# EAGLE board pcb_offset_components (EAGLE 9.5.1)

Size 88.42 x 54.42 mm. Coordinates in mm from the lower left corner, seen from the top.
Outline: 1.18,45.55 0.18,45.55 arc90 0,45.38 0,16.98 arc90 0.18,16.8 1.18,16.8 arc-90 8.8,9.18 8.8,0.18 arc90 8.98,0 79.38,0 arc97 79.55,0.2 arc-97 87.18,8.86 88.18,8.86 arc89 88.29,8.97 88.42,15.34 88.42,37.38 arc90 88.18,37.62 87.18,37.62 arc-90 79.62,45.18 79.62,54.18 arc90 79.38,54.42 8.98,54.42 arc99 8.74,54.14 arc-97 1.18,45.55
Outline: circle at 84.18,11.18 radius 2
Outline: circle at 4.18,43.18 radius 2
Copper layers (1*16): Top 0.035mm / dielectric 1.5mm / Bottom 0.035mm
Design rules "default": minimum track width 6mil, minimum drill 0.35mm, track to track 6mil, track to pad 6mil, pad to pad 6mil, via to via 6mil, smd to smd 6mil, copper to edge 40mil, drill to drill 6mil, minimum pad ring 10mil, minimum via ring 8mil, stop-mask expansion 4mil, vias tented up to drill 0mil, thermal gap 10mil

## Footprints (pad centres in the part's own frame; a part is rotated, then mirrored left to right if it is on the bottom)
C0603 = smd 1.1 x 1: 1 -0.85,0; 2 0.85,0
RBP135 = smd 1.02 x 1.78: 1 -1.93,-4.065; 2 0,-4.065; 3 1.93,-4.065; 5 1.93,4.065; 6 0,4.065; 7 -1.93,4.065 | smd 1.78 x 1.02: 4 4.065,0; 8 -4.065,0
VLPR248582 = drill 1.5 pad 2.25: 1 0,0; 2 0,4.7
DG983-1 = smd 0.66 x 0.31: 1 -1.775,1; 2 -1.775,0.5; 3 -1.775,0; 4 -1.775,-0.5; 5 -1.775,-1; 11 1.775,-1; 12 1.775,-0.5; 13 1.775,0; 14 1.775,0.5; 15 1.775,1 | smd 0.31 x 0.66: 6 -1,-1.775; 7 -0.5,-1.775; 8 0,-1.775; 9 0.5,-1.775; 10 1,-1.775; 16 1,1.775; 17 0.5,1.775; 18 0,1.775; 19 -0.5,1.775; 20 -1,1.775 | smd 1.78 x 1.78: X 0,0
PHA13LN = smd 0.71 x 1.5: 1 -1.5,-1.56; 3 1.5,-1.56 | smd 0.91 x 2.5: 2 0,-1.06 | smd 1.91 x 2.92: 4 0,1.56
SOTFL254P691X411-6N = smd 0.935 x 0.96: 1 -3.262,2.54; 2 -3.262,0; 3 -3.262,-2.54; 4 3.262,-2.54; 5 3.262,0; 6 3.262,2.54
QCV151 = smd 0.6 x 1.5: 1 1,1.5; 2 0,1.5; 3 -1,1.5; 4 -1,-1.5; 5 0,-1.5; 6 1,-1.5
SOT95P280X145-5N = smd 1.25 x 0.6: 1 -1.25,0.95; 2 -1.25,0; 3 -1.25,-0.95; 4 1.25,-0.95; 5 1.25,0.95
SOT95P280X145-6N = smd 1.2 x 0.6: 1 -1.25,0.95; 2 -1.25,0; 3 -1.25,-0.95; 4 1.25,-0.95; 5 1.25,0; 6 1.25,0.95
HDRV6W66P0X254_1X6_1524X254X96 = drill 1.15 pad 1.725 square: 1 0,0 | drill 1.15 pad 1.725: 2 2.54,0; 3 5.08,0; 4 7.62,0; 5 10.16,0; 6 12.7,0
M209730245 = drill 1 pad 1.5: 1 0,0; 2 2.54,0
L3225M = smd 1.6 x 2.2: 1 -1.4,0; 2 1.4,0
LEDC2012X85N = smd 0.9 x 1.4: 1 -0.95,0; 2 0.95,0
APDA3020LZGCK = smd 2 x 1: 1 -1.5,0; 2 1.5,0
R0603 = smd 1 x 1.1: 1 -0.85,0; 2 0.85,0
LPFC011304S = drill 3.61 pad 5.415: 1 0,0; 2 7.15,0
BU-SMA-G = drill 1.27: 1 0,0 | drill 1.778: 2 -2.55,2.55; 3 2.55,2.55; 4 2.55,-2.55; 5 -2.55,-2.55
J502-ND-142-0701-801/806 = smd 5.08 x 2.286: 1 2.565,0; G@1 2.565,4.42; G@2 2.565,-4.42 | smd 5.08 x 2.286 bottom: G@3 2.565,4.42; G@4 2.565,-4.42

## Placement (x,y rotation side)
C7  2.2e-6  [C0603]  49.53,24.13 180 top
C8  2.2e-6  [C0603]  49.53,11.43 180 top
C9  2.2e-6  [C0603]  40.64,11.43 180 top
C10  2.2e-6  [C0603]  40.64,24.13 180 top
C11  10e-6  [C0603]  53.34,33.02 0 top
C12  1e-9  [C0603]  53.34,35.56 0 top
C13  10e-6  [C0603]  53.34,15.24 0 top
C14  1e-9  [C0603]  53.34,17.78 0 top
C15  1e-6  [C0603]  8.89,35.56 180 top
C16  0.01e-6  [C0603]  16.51,30.48 270 top
C17  3.3e-6  [C0603]  19.05,30.48 270 top
C18  100e-12  [C0603]  21.59,30.48 270 top
C19  100e-12  [C0603]  43.18,45.72 270 top
C20  100e-12  [C0603]  35.56,45.72 90 top
C21  100e-12  [C0603]  30.48,45.72 270 top
C22  100e-12  [C0603]  22.86,45.72 90 top
FL1  RBP-135+  [RBP135]  62.23,16.51 270 top
FL2  RBP-135+  [RBP135]  62.1,34.42 270 top
IC1  VLPR-24-858-2  [VLPR248582]  74.93,33.02 0 top
IC2  VLPR-24-858-2  [VLPR248582]  74.93,22.86 0 top
IC3  HSWA2-30DR+  [DG983-1]  11.43,20.32 270 top
IC4  VLPR-24-858-2  [VLPR248582]  74.93,12.7 0 top
IC5  HSWA2-30DR+  [DG983-1]  16.51,10.16 270 top
IC6  HSWA2-30DR+  [DG983-1]  25.4,24.13 270 top
IC7  HSWA2-30DR+  [DG983-1]  25.4,16.51 270 top
IC8  PHA-13LN+  [PHA13LN]  44.45,29.21 0 top
IC9  PHA-13LN+  [PHA13LN]  44.45,16.51 0 top
IC10  ADP-2-1+_MINICIRCUITS  [SOTFL254P691X411-6N]  33.02,13.97 270 top
IC11  ADP-2-1+_MINICIRCUITS  [SOTFL254P691X411-6N]  33.02,26.67 270 top
IC12  QCV-151+  [QCV151]  19.05,20.32 90 top
IC13  MAX8878EUK28+T  [SOT95P280X145-5N]  12.7,33.02 0 top
IC14  SN74LVC2G17DBVT  [SOT95P280X145-6N]  22.86,40.64 90 top
IC15  SN74LVC2G17DBVT  [SOT95P280X145-6N]  35.56,40.64 90 top
J1  M20-9730645  [HDRV6W66P0X254_1X6_1524X254X96]  46.99,43.18 0 top
J5  M20-9730245  [M209730245]  12.7,43.18 0 top
L1  15e-6  [L3225M]  49.53,31.75 270 top
L2  15e-6  [L3225M]  49.53,19.05 270 top
LED1  APT2012LZGCK  [LEDC2012X85N]  97.79,38.1 0 top  (outside the outline)
LED2  APT2012LZGCK  [LEDC2012X85N]  97.79,22.86 0 top  (outside the outline)
LED3  APDA3020LZGCK  [APDA3020LZGCK]  86.36,34.29 90 top
LED4  APT2012LZGCK  [LEDC2012X85N]  97.79,7.62 0 top  (outside the outline)
LED5  APDA3020LZGCK  [APDA3020LZGCK]  86.36,26.67 90 top
LED6  APDA3020LZGCK  [APDA3020LZGCK]  86.36,17.78 90 top
R1  430  [R0603]  87.63,60.96 0 top  (outside the outline)
R2  430  [R0603]  82.55,60.96 0 top  (outside the outline)
R3  430  [R0603]  77.47,60.96 0 top  (outside the outline)
R7  50  [R0603]  17.78,16.51 180 top
R8  50  [R0603]  26.67,20.32 180 top
R9  50  [R0603]  26.67,12.7 180 top
R10  10e6  [R0603]  19.05,35.56 90 top
R11  1e6  [R0603]  21.59,35.56 90 top
R12  1e6  [R0603]  24.13,35.56 90 top
R13  10e6  [R0603]  26.67,35.56 90 top
R14  10e6  [R0603]  31.75,35.56 90 top
R15  1e6  [R0603]  34.29,35.56 90 top
R16  1e6  [R0603]  36.83,35.56 90 top
R17  10e6  [R0603]  39.37,35.56 90 top
R18  10e3  [R0603]  38.1,45.72 90 top
R19  10e3  [R0603]  40.64,45.72 90 top
R20  10e3  [R0603]  25.4,45.72 90 top
R21  10e3  [R0603]  27.94,45.72 90 top
U1  LPF-C011304S  [LPFC011304S]  95.25,26.67 270 top  (outside the outline)
U2  LPF-C011304S  [LPFC011304S]  95.25,41.91 270 top  (outside the outline)
U3  LPF-C011304S  [LPFC011304S]  95.25,11.43 270 top  (outside the outline)
X1  BU-SMA-G  [BU-SMA-G]  41.91,-11.43 0 top  (outside the outline)
X3  SMA-142-0701-801/806  [J502-ND-142-0701-801/806]  68.58,52.07 270 top
X4  SMA-142-0701-801/806  [J502-ND-142-0701-801/806]  68.58,-1.27 90 top
X5  SMA-142-0701-801/806  [J502-ND-142-0701-801/806]  0,25.4 0 top

## Library data of the parts
C7-C22 = rcl; SPICEPREFIX: C
FL1 FL2 = RBP-135+; DESCRIPTION: Metal Shield Bandpass Filter; HEIGHT: 2.54mm; MANUFACTURER_NAME: Mini-Circuits; MANUFACTURER_PART_NUMBER: RBP-135+
IC1 IC2 IC4 = VLPR-24-858-2; DESCRIPTION: LED Light Pipes Light Pipe Vert SMD Rect Face; HEIGHT: 21mm; MANUFACTURER_NAME: Bivar; MANUFACTURER_PART_NUMBER: VLPR-24-858-2; RS_PART_NUMBER: 9063748; RS_PRICE-STOCK: http://uk.rs-online.com/web/p/products/9063748
IC3 IC5-IC7 = minicircuits; OC_FARNELL: unknown; OC_NEWARK: unknown
IC8 IC9 = PHA-13LN+; DESCRIPTION: ic; HEIGHT: 1.6mm; MANUFACTURER_NAME: Mini Circuits; MANUFACTURER_PART_NUMBER: PHA-13LN+
IC10 IC11 = ADP-2-1+_MINICIRCUITS; DESCRIPTION: Power Splitter/Combiner; HEIGHT: 4.11mm; MANUFACTURER_NAME: Mini-Circuits; MANUFACTURER_PART_NUMBER: ADP-2-1+ MINICIRCUITS
IC12 = QCV-151+; DESCRIPTION: 2 Way-90 Power Splitter; HEIGHT: 1.652mm; MANUFACTURER_NAME: Mini-Circuits; MANUFACTURER_PART_NUMBER: QCV-151+
IC13 = MAX8878EUK28+T; DESCRIPTION: LDO Voltage Regulators Low-Noise, Low-Dropout, 150mA Linear Regulators with 2982 Pinout; HEIGHT: 1.45mm; MANUFACTURER_NAME: Maxim Integrated; MANUFACTURER_PART_NUMBER: MAX8878EUK28+T
IC14 IC15 = SN74LVC2G17DBVT; DESCRIPTION: DUAL SCHMITT-TRIGGER BUFFER; HEIGHT: 1.45mm; MANUFACTURER_NAME: Texas Instruments; MANUFACTURER_PART_NUMBER: SN74LVC2G17DBVT; MOUSER_PART_NUMBER: 595-SN74LVC2G17DBVT; MOUSER_PRICE-STOCK: https://www.mouser.com/Search/Refine.aspx?Keyword=595-SN74LVC2G17DBVT; RS_PART_NUMBER: 6628944P; RS_PRICE-STOCK: http://uk.rs-online.com/web/p/products/6628944P
J1 = M20-9730645; DESCRIPTION: Headers & Wire Housings 06 SIL VERTICAL PIN HEADER GOLD HT; HEIGHT: 9.64mm; MANUFACTURER_NAME: HARWIN; MANUFACTURER_PART_NUMBER: M20-9730645; MOUSER_PART_NUMBER: 855-M20-9730645; MOUSER_PRICE-STOCK: https://www.mouser.com/Search/Refine.aspx?Keyword=855-M20-9730645
J5 = M20-9730245; DESCRIPTION: Headers & Wire Housings 02 SIL VERTICAL PIN HEADER GOLD HT; HEIGHT: 9.79mm; MANUFACTURER_NAME: HARWIN; MANUFACTURER_PART_NUMBER: M20-9730245; MOUSER_PART_NUMBER: 855-M20-9730245; MOUSER_PRICE-STOCK: https://www.mouser.com/Search/Refine.aspx?Keyword=855-M20-9730245
L1 L2 = rcl; SPICEPREFIX: L
LED1 LED2 LED4 = APT2012LZGCK; ALLIED_NUMBER: 71056205; ALLIED_PRICE-STOCK: https://www.alliedelec.com/kingbright-apt2012lzgck/71056205/; DESCRIPTION: Standard LEDs - SMD 2.0X1.2MM LOW CRNT; HEIGHT: 0.85mm; MANUFACTURER_NAME: Kingbright; MANUFACTURER_PART_NUMBER: APT2012LZGCK; MOUSER_PART_NUMBER: 604-APT2012LZGCK; MOUSER_PRICE-STOCK: https://www.mouser.com/Search/Refine.aspx?Keyword=604-APT2012LZGCK
LED3 LED5 LED6 = APDA3020LZGCK; DESCRIPTION: Standard LEDs - SMD 3.0X2.0MM RA. GREEN SMD; HEIGHT: mm; MANUFACTURER_NAME: Kingbright; MANUFACTURER_PART_NUMBER: APDA3020LZGCK; MOUSER_PART_NUMBER: 604-APDA3020LZGCK; MOUSER_PRICE-STOCK: https://www.mouser.com/Search/Refine.aspx?Keyword=604-APDA3020LZGCK
R1-R3 R7-R21 = rcl; SPICEPREFIX: R
U1-U3 = LPF-C011304S; DESCRIPTION: LED Light Pipes RA Light Pipe Clr 2.8mm Round; HEIGHT: 5.1mm; MANUFACTURER_NAME: Lumex; MANUFACTURER_PART_NUMBER: LPF-C011304S; MOUSER_PART_NUMBER: 696-LPF-C011304S; MOUSER_PRICE-STOCK: https://www.mouser.com/Search/Refine.aspx?Keyword=696-LPF-C011304S; RS_PART_NUMBER: 8885925; RS_PRICE-STOCK: http://uk.rs-online.com/web/p/products/8885925
X1 = con-coax; OC_FARNELL: unknown; OC_NEWARK: unknown
X3-X5 = sma-flange_375mils; MF: JOHNSON COMPONENTS; MPN: 142-0701-801; OC_FARNELL: 1608592; OC_NEWARK: 90F2624

## Nets
GND: C11.1 C12.1 C13.1 C14.1 C15.2 C16.2 C17.2 C18.2 C19.1 C20.2 C21.1 C22.2 FL1.1 FL1.3 FL1.4 FL1.5 FL1.7 FL1.8 FL2.1 FL2.3 FL2.4 FL2.5 FL2.7 FL2.8 IC3.1 IC3.2 IC3.4 IC3.5 IC3.6 IC3.7 IC3.9 IC3.10 IC3.11 IC3.12 IC3.14 IC3.15 IC3.18 IC3.19 IC3.X IC5.1 IC5.2 IC5.4 IC5.5 IC5.6 IC5.7 IC5.9 IC5.10 IC5.11 IC5.12 IC5.14 IC5.15 IC5.18 IC5.19 IC5.X IC6.1 IC6.2 IC6.4 IC6.5 IC6.6 IC6.7 IC6.9 IC6.10 IC6.11 IC6.12 IC6.14 IC6.15 IC6.18 IC6.19 IC6.X IC7.1 IC7.2 IC7.4 IC7.5 IC7.6 IC7.7 IC7.9 IC7.10 IC7.11 IC7.12 IC7.14 IC7.15 IC7.18 IC7.19 IC7.X IC8.2 IC8.4 IC9.2 IC9.4 IC10.6 IC11.6 IC12.2 IC12.5 IC13.2 IC14.2 IC15.2 J1.5 J1.6 J5.2 LED1.1 LED2.1 LED4.1 R7.1 R8.1 R9.1 R10.1 R13.1 R14.1 R17.1 R18.2 R19.2 R20.2 R21.2 X3.G@1 X3.G@2 X3.G@3 X3.G@4 X4.G@1 X4.G@2 X4.G@3 X4.G@4 X5.G@1 X5.G@2 X5.G@3 X5.G@4
N$1: LED2.2 R3.2
N$2: LED1.2 R1.2
N$3: LED4.2 R2.2
N$4: IC5.13 IC10.3
N$5: IC3.8 X5.1
N$6: C10.2 IC11.1
N$7: IC7.3 IC10.4
N$8: C20.1 IC5.17 IC15.6 R18.1
N$9: IC7.8 IC12.4
N$13: C10.1 IC8.1
N$14: IC3.3 IC12.1
N$15: IC3.13 IC5.8
N$16: IC6.8 IC12.6
N$18: IC6.3 IC11.4
N$19: IC6.13 R8.2
N$20: C7.2 IC8.3 L1.2
N$21: C9.2 IC10.1
N$22: IC11.2 IC11.5
N$23: IC5.3 IC11.3
N$25: IC10.2 IC10.5
N$26: C9.1 IC9.1
N$27: C8.2 IC9.3 L2.2
N$28: C7.1 FL2.2
N$29: FL2.6 X3.1
N$30: C8.1 FL1.2
N$31: FL1.6 X4.1
N$32: IC12.3 R7.2
N$35: IC7.13 R9.2
N$36: C11.2 C12.2 C13.2 C14.2 C15.1 IC13.1 IC13.3 J5.1 L1.1 L2.1
N$37: IC14.1 J1.1 R2.1 R10.2 R11.2
N$38: C19.2 IC5.16 IC15.4 R19.1
N$39: C17.1 C18.1 IC3.20 IC5.20 IC6.20 IC7.20 IC13.5 IC14.5 IC15.5 R11.1 R12.1
N$40: C16.1 IC13.4
N$42: C22.1 IC3.17 IC6.17 IC7.17 IC14.6 R20.1
N$43: IC14.3 J1.2 R12.2 R13.2
N$44: IC15.1 J1.3 R1.1 R14.2 R15.2
N$45: IC15.3 J1.4 R3.1 R16.2 R17.2
N$46: C21.2 IC3.16 IC6.16 IC7.16 IC14.4 R21.1
N$48: R15.1 R16.1

## Tracks (layer width: path | path; a pad name or v marks a point on that pad's centre or on a via)
GND  (123 unrouted)
N$1  (1 unrouted)
N$2  (1 unrouted)
N$3  (1 unrouted)
N$4  (1 unrouted)
N$5  (1 unrouted)
N$6  (1 unrouted)
N$7  (1 unrouted)
N$8  (3 unrouted)
N$9  (1 unrouted)
N$13  (1 unrouted)
N$14  (1 unrouted)
N$15  (1 unrouted)
N$16  (1 unrouted)
N$18  (1 unrouted)
N$19  (1 unrouted)
N$20  (2 unrouted)
N$21  (1 unrouted)
N$22  (1 unrouted)
N$23  (1 unrouted)
N$25  (1 unrouted)
N$26  (1 unrouted)
N$27  (2 unrouted)
N$28  (1 unrouted)
N$29  (1 unrouted)
N$30  (1 unrouted)
N$31  (1 unrouted)
N$32  (1 unrouted)
N$35  (1 unrouted)
N$36  (9 unrouted)
N$37  (4 unrouted)
N$38  (3 unrouted)
N$39  (10 unrouted)
N$40  (1 unrouted)
N$42  (5 unrouted)
N$43  (3 unrouted)
N$44  (4 unrouted)
N$45  (4 unrouted)
N$46  (5 unrouted)
N$48  (1 unrouted)